# EAGLE board MJ818 original (EAGLE 8.3.1)

Size 32 x 32 mm. Coordinates in mm from the lower left corner, seen from the top.
Outline: 16,27 arc-90 27,16 arc-90 16,5 arc-90 5,16 arc-90 16,27
Outline: 16,32 arc90 0,16 arc90 16,0 arc90 32,16 arc90 16,32
Copper layers (1*16): Top 0.035mm / dielectric 1.5mm / Bottom 0.035mm
Design rules "default": minimum track width 6mil, minimum drill 0.35mm, track to track 6mil, track to pad 6mil, pad to pad 6mil, via to via 6mil, smd to smd 6mil, copper to edge 40mil, drill to drill 6mil, minimum pad ring 10mil, minimum via ring 8mil, stop-mask expansion 4mil, vias tented up to drill 0mil, thermal gap 10mil
Milling: 16 lines

## Footprints (pad centres in the part's own frame; a part is rotated, then mirrored left to right if it is on the bottom)
C3225 = smd 1.6 x 2.7: 1 -1.4,0; 2 1.4,0
C2012 = smd 1.3 x 1.5: 1 -0.85,0; 2 0.85,0
SMB = smd 2.4 x 2.4: A 2.2,0; C -2.2,0
SIP3-UA = drill 0.6 pad 0.7 long: 1 -1.27,0; 2 0,0; 3 1.27,0
SO08_MCU = smd 0.6 x 1.2: 1 -1.905,-2.8; 2 -0.635,-2.8; 3 0.635,-2.8; 4 1.905,-2.8; 5 1.905,2.8; 6 0.635,2.8; 7 -0.635,2.8; 8 -1.905,2.8
SOT-23-6 = smd 1 x 0.55: CSN -1.35,0.95; DIM -1.35,0; DRV 1.35,0; GND 1.35,0.95; VCC 1.35,-0.95; VIN -1.35,-0.95
MS50 = smd 2.8 x 1.4: 1 0,-1.7; 2 0,1.7
GM5BW96385A = smd 1.5 x 2.6: A -1.5,0; C 1.5,0
CREE-XLAMP-XM-L = smd 0.5 x 4.8: A 2.141,0; C -2.141,0 | smd 0.5 x 0.5: A@1 2.54,0; C@1 -2.54,0 | smd 2.782 x 4.8: EXP 0,0
SOT23-W = smd 1.2 x 1.4: 1 -1.1,-1.3; 2 1.1,-1.3 | smd 2.8 x 1.4: 3 0,1.3
R3216 = smd 1.6 x 1.8: 1 -1.4,0; 2 1.4,0

## Placement (x,y rotation side)
C1  11uF  [C3225]  -16,19 270 top  (outside the outline)
C2  1uF  [C2012]  -9,-1 0 top  (outside the outline)
D1  MBRS130LT3  [SMB]  -39,25 180 top  (outside the outline)
IC1  48104 AVR21  [SIP3-UA]  -2,-5 90 top  (outside the outline)
IC2  ATTINY13SOIC  [SO08_MCU]  -15,-5 180 top  (outside the outline)
IC4  QX5241A  [SOT-23-6]  -27,19 180 top  (outside the outline)
L1  470uH  [MS50]  -58,15 270 top  (outside the outline)
LED1  GM5BW96385A  [GM5BW96385A]  -68,-3 0 top  (outside the outline)
LED2  GM5BW96385A  [GM5BW96385A]  -59,-3 0 top  (outside the outline)
LED3  GM5BW96385A  [GM5BW96385A]  -51,-3 0 top  (outside the outline)
LED4  GM5BW96385A  [GM5BW96385A]  -68,-10 0 top  (outside the outline)
LED5  GM5BW96385A  [GM5BW96385A]  -59,-10 0 top  (outside the outline)
LED6  GM5BW96385A  [GM5BW96385A]  -51,-10 0 top  (outside the outline)
LED7  GM5BW96385A  [GM5BW96385A]  -68,-18 0 top  (outside the outline)
LED8  GM5BW96385A  [GM5BW96385A]  -59,-18 0 top  (outside the outline)
LED9  GM5BW96385A  [GM5BW96385A]  -51,-18 0 top  (outside the outline)
LED10  CREE-XLAMP-XM-L  [CREE-XLAMP-XM-L]  -49,15 180 top  (outside the outline)
Q1  [SOT23-W]  -40,-10 90 top  (outside the outline)
Q11  [SOT23-W]  -40,15 90 top  (outside the outline)
R1  inf  [R3216]  -16,3 90 top  (outside the outline)
R2  0.25  [R3216]  -21,19 90 top  (outside the outline)
R3  100  [R3216]  -77,-3 0 top  (outside the outline)
R4  100  [R3216]  -77,-10 0 top  (outside the outline)
R6  100  [R3216]  -77,-18 0 top  (outside the outline)

## Library data of the parts
C1 C2 R1-R4 R6 = rcl
D1 = diode
IC1 = allegro; OC_FARNELL: unknown; OC_NEWARK: unknown
IC2 = SparkFun-Retired
IC4 = QX5241a - LED Driver
L1 = inductor-neosid; OC_FARNELL: unknown; OC_NEWARK: unknown
LED1-LED10 = led
Q1 Q11 = adafruit

## Nets
CSN: IC4.CSN L1.1 R2.1
DIM: IC2.5 IC4.DIM
GND: C1.2 C2.2 IC1.2 IC2.8 IC4.GND Q1.2 Q11.2 R1.2
LED: L1.2 LED10.A LED10.A@1
MAGNET_SENSE: IC1.3 IC2.2
N$1: LED1.C LED2.A
N$2: LED2.C LED3.A
N$3: LED7.C LED8.A
N$4: LED8.C LED9.A
N$5: LED1.A R3.2
N$6: LED4.A R4.2
N$7: LED4.C LED5.A
N$8: LED5.C LED6.A
N$9: LED7.A R6.2
N$13: IC2.3 R1.1
Q1_GATE: IC4.DRV Q11.1
Q2_DRAIN: D1.A LED3.C LED6.C LED9.C LED10.C LED10.C@1 Q1.3 Q11.3
Q2_GATE: IC2.7 Q1.1
SUPPLY_INNER: C1.1 D1.C IC4.VIN R2.2 R3.1 R4.1 R6.1
VCC: C2.1 IC1.1 IC2.1 IC4.VCC

## Tracks (layer width: path | path; a pad name or v marks a point on that pad's centre or on a via)
CSN  (2 unrouted)
DIM  (1 unrouted)
GND  (7 unrouted)
LED  (2 unrouted)
MAGNET_SENSE  (1 unrouted)
N$1  (1 unrouted)
N$2  (1 unrouted)
N$3  (1 unrouted)
N$4  (1 unrouted)
N$5  (1 unrouted)
N$6  (1 unrouted)
N$7  (1 unrouted)
N$8  (1 unrouted)
N$9  (1 unrouted)
N$13  (1 unrouted)
Q1_GATE  (1 unrouted)
Q2_DRAIN  (7 unrouted)
Q2_GATE  (1 unrouted)
SUPPLY_INNER  (6 unrouted)
VCC  (3 unrouted)